# Altium PCB Rev(5).PCBDOC (part 3 of 3)
Units mm, origin at the board's own origin, x right, y up, seen from the top; angles counter-clockwise.
Board outline 161.79 x 99.5 mm, 4 copper layers (Top Layer, InternalPlane1, InternalPlane2, Bottom Layer); 374 components, 275 nets, 1404 pads, 444 vias.
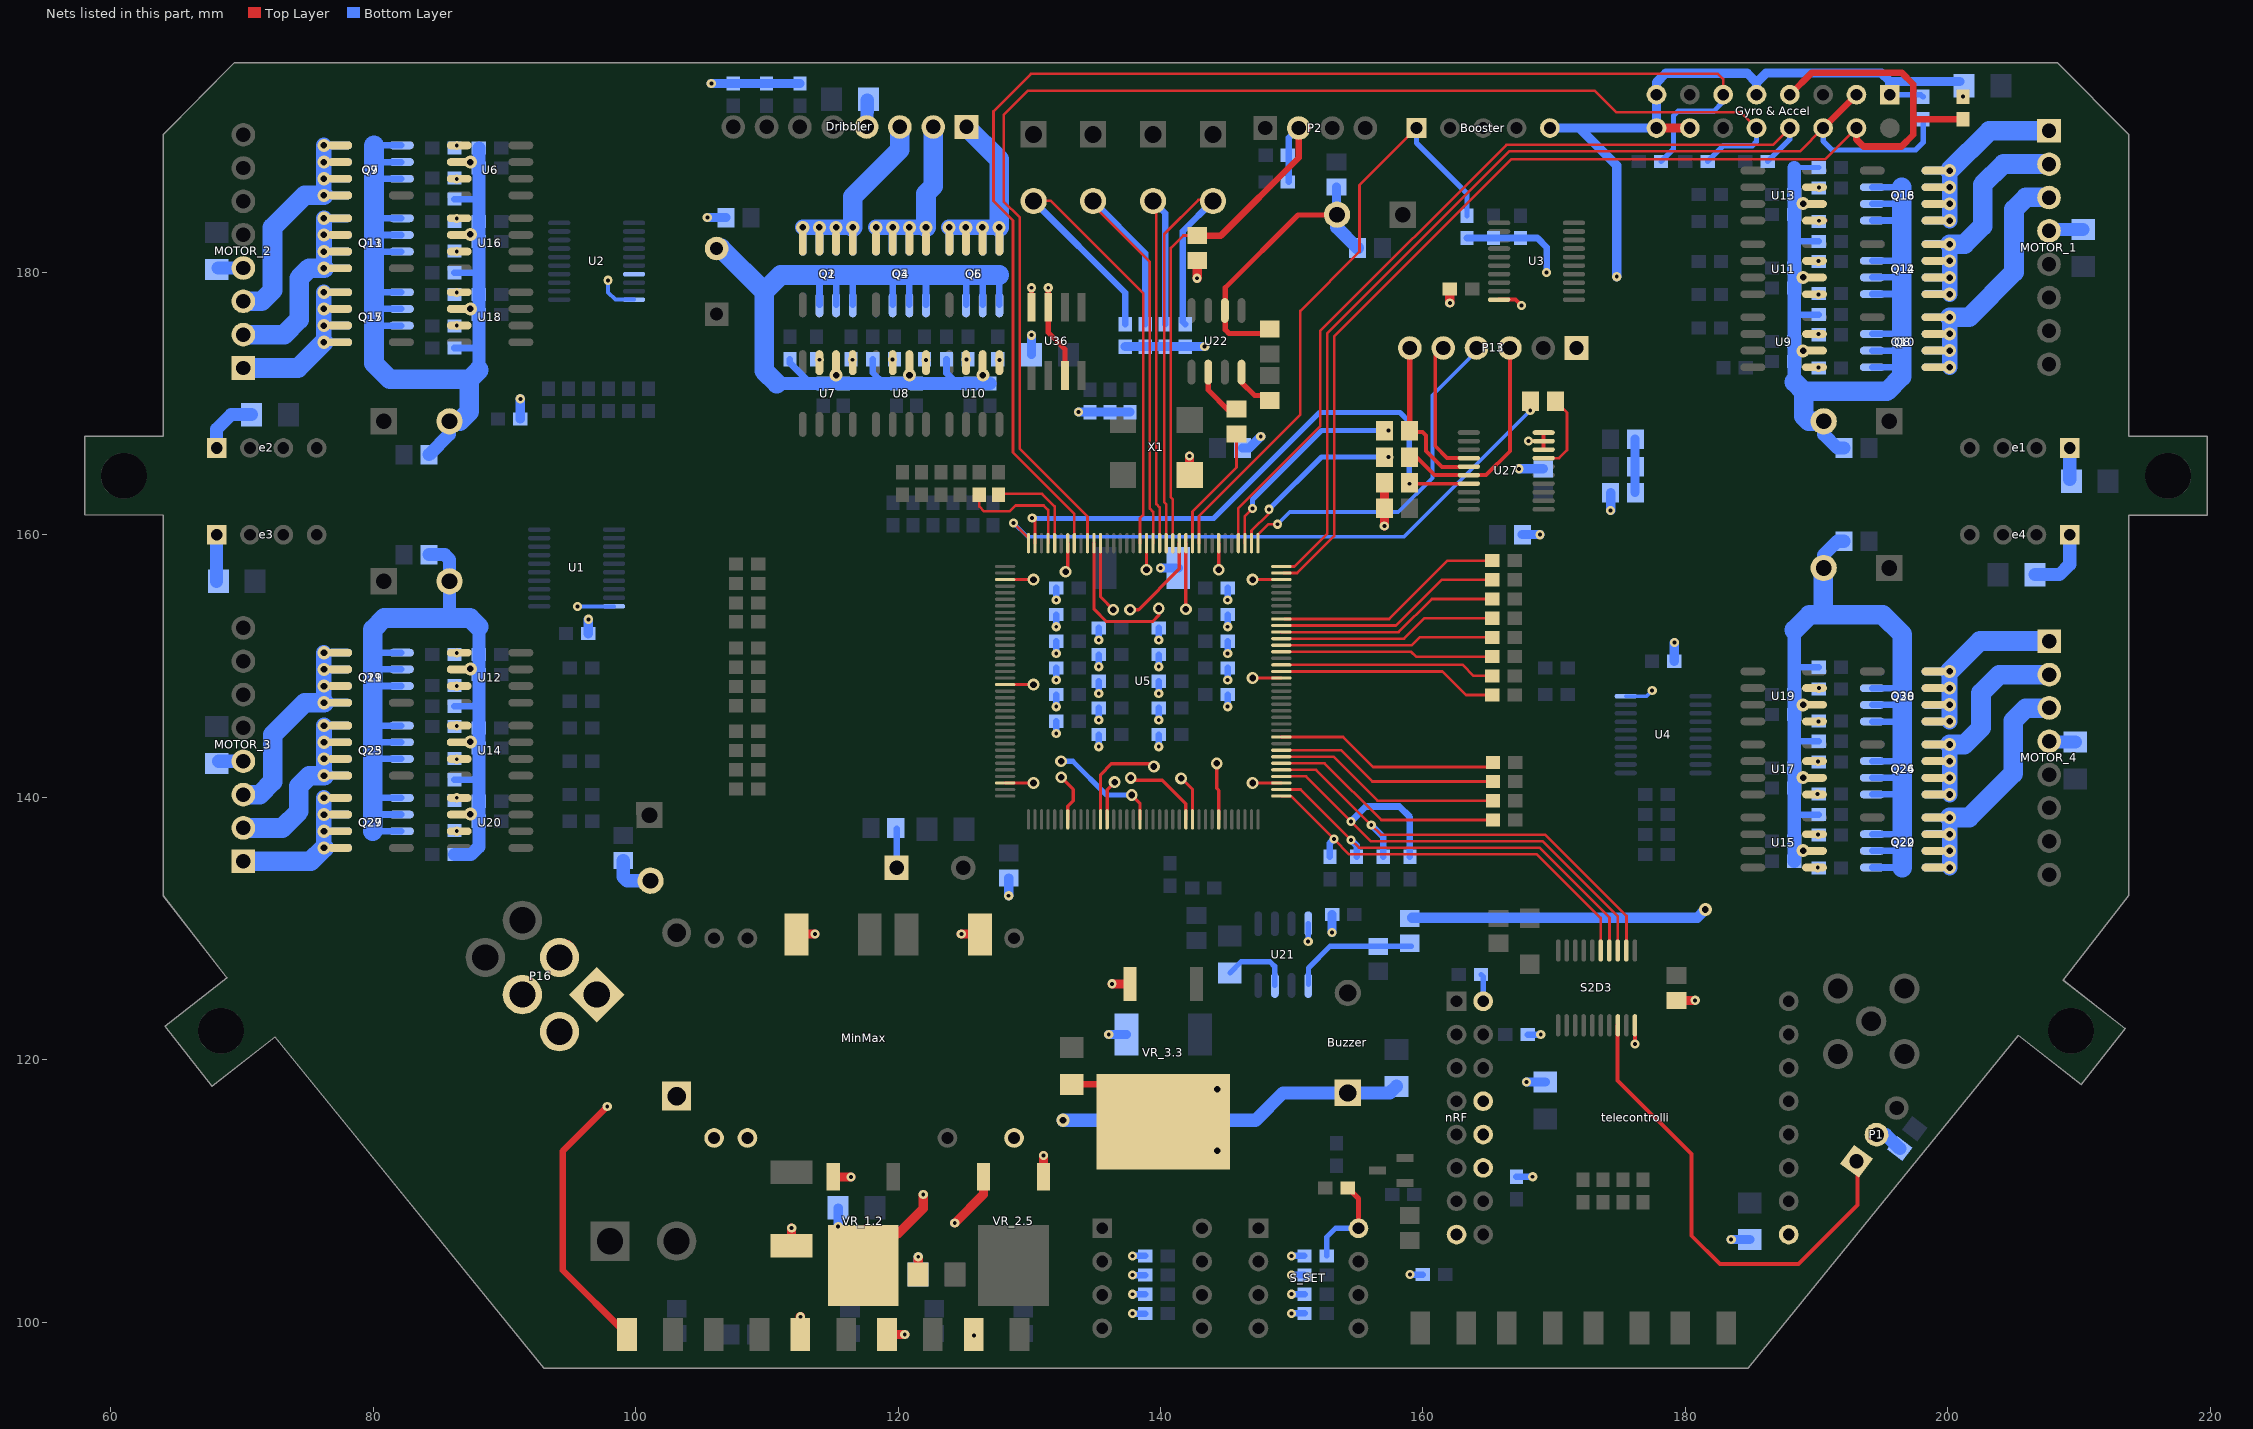
[diagram p5: the nets of this part, all layers, seen from the top]

## Via types
v1: diameter 0.7, hole 0.3, Top Layer to Bottom Layer, 308 vias
v2: diameter 1, hole 0.5, Top Layer to Bottom Layer, 66 vias
v3: diameter 0.9, hole 0.5, Top Layer to Bottom Layer, 38 vias
v4: diameter 0.99, hole 0.5, Top Layer to Bottom Layer, 30 vias
v5: diameter 0.6, hole 0.3, Top Layer to Bottom Layer, 2 vias

## Nets (pads, with @x,y where several pads share a name; then routed paths per layer and width w, separated by ;. In a path a pad name is that pad's centre, name@x,y a point inside that pad or via, vN(x,y) a via of type N, cw(c..) or ccw(c..) an arc to the next point about the centre after c; other vN are vias at no path point) (continued)
NetR22_1: R22.1 U22.4 | length 3.3
  Top Layer w0.4: U22.4@146.177,172.402 146.177,171.623 147.18,170.62 R22.1@148.32,170.62
NetR31_2: R31.2 R345.2 R346.2 | length 4.1
  Bottom Layer w0.7: R345.2@176.17,163.25 176.17,165.246 176.17,167.278 R346.2@176.17,167.31
NetR43_1: R43.1 R45.2 U21.1 | length 13.5
  Bottom Layer w0.4: U21.1@151.27,125.75 151.27,127 152.916,128.646 ; R45.2@156.604,128.646 152.916,128.646 ; R43.1@159.134,128.646 159.004,128.646 152.916,128.646
NetR46_2: R46.2 U21.3 | length 5.4
  Bottom Layer w0.4: R46.2@145.288,126.616 146.142,127.47 148.35,127.47 148.7,127.12 U21.3@148.7,125.66
NetR47_1: R47.1 U7.7
  other v1: 114.02,173.35
NetR48_1: R48.1 U7.5
  other v1: 116.53,173.35
NetR49_1: R49.1 U8.7
  other v1: 119.58,173.36
NetR50_1: R50.1 U8.5
  other v1: 122.14,173.34
NetR51_1: R51.1 U10.7
  other v1: 125.2,173.36
NetR52_1: R52.1 U10.5
  other v1: 127.72,173.34
NetR59_1: R59.1 U6.7
  other v1: 86.37,187.13
NetR60_1: R60.1 U9.7
  other v1: 190.15,175.31
NetR61_1: R61.1 U6.5
  other v1: 86.37,189.68
NetR62_1: R62.1 U9.5
  other v1: 190.14,172.76
NetR65_1: R65.1 U16.7
  other v1: 86.37,181.59
NetR66_1: R66.1 U11.7
  other v1: 190.14,180.86
NetR67_1: R67.1 U16.5
  other v1: 86.37,184.12
NetR68_1: R68.1 U11.5
  other v1: 190.15,178.32
NetR71_1: R71.1 U18.7
  other v1: 86.37,175.96
NetR72_1: R72.1 U13.7
  other v1: 190.2,186.48
NetR73_1: R73.1 U18.5
  other v1: 86.37,178.48
NetR74_1: R74.1 U13.5 | length 0.8
  Top Layer w0.4: U13.5@189.84,183.951 190.19,183.951 U13.5@190.631,183.951
  other v1: 190.19,183.94
NetR77_1: R77.1 U12.7
  other v1: 86.37,148.47
NetR78_1: R78.1 U15.7
  other v1: 190.12,137.17
NetR79_1: R79.1 U12.5
  other v1: 86.37,151
NetR80_1: R80.1 U15.5
  other v1: 190.09,134.64
NetR83_1: R83.1 U14.7
  other v1: 86.37,142.9
NetR84_1: R84.1 U17.7
  other v1: 190.12,142.74
NetR85_1: R85.1 U14.5
  other v1: 86.37,145.45
NetR86_1: R86.1 U17.5
  other v1: 190.08,140.24
NetR89_1: R89.1 U20.7
  other v1: 86.37,137.42
NetR90_1: R90.1 U19.7
  other v1: 190.17,148.32
NetR91_1: R91.1 U20.5
  other v1: 86.37,139.97
NetR92_1: R92.1 U19.5
  other v1: 190.14,145.78
NetR112_1: R112.1 R148.1 S_SET.8 | length 7.5
  Top Layer w0.4: R148.1@154.266,110.236 155.086,109.416 S_SET.8@155.086,107.156
  Bottom Layer w0.4: R112.1@152.672,105.058 152.672,106.492 153.336,107.156 S_SET.8@155.086,107.156
NetR122_2: R122.2 S4.1 | length 3
  Bottom Layer w0.5: S4.1@119.888,134.63 R122.2@119.888,137.602
NetR333_1: R333.1 U22.2 | length 4
  Top Layer w0.4: U22.2@143.64,172.402 143.64,171.04 145.15,169.53 R333.1@145.64,169.53
NetR341_2: R341.2 U5.144 | length 45.8
  Top Layer w0.2: v1(128.8,160.91) 129.934,159.776 U5.144@129.934,159.369
  Bottom Layer w0.3: v1(128.8,160.91) 129.85,159.86 158.55,159.86 v1(168.18,169.49)
NetR342_2: R342.2 U5.110 | length 13.7
  Top Layer w0.2: U5.110@146.934,159.369 146.934,160.324 148.25,161.64 v1@148.25,161.75
  Bottom Layer w0.4: v1(148.28,161.95) 152.27,165.94 v1@157.39,165.94
  other v1: 157.39,165.92
NetR343_2: R343.2 U5.111 | length 16.1
  Top Layer w0.2: U5.111@146.434,159.369 146.434,161.424 v1(147.02,162.01)
  Bottom Layer w0.4: v1(147.02,162.01) 147.02,162.69 152.28,167.95 v1@157.34,167.95
  other v1: 157.37,167.95
O11: MOTOR_1.3 Q8.5 Q8.6 Q8.7 Q8.8 Q10.5 Q10.6 Q10.7 Q10.8 | length 18
  Bottom Layer w1.2: v2@200.15,172.773 v2@200.15,176.583
  Bottom Layer w1.5: v2@200.15,176.583 201.613,176.583 205.05,180.02 205.05,184.81 205.96,185.72 MOTOR_1.3@207.724,185.72
  other v2: 200.14,172.773 200.14,174.043 200.14,175.313 200.14,176.583
O12: MOTOR_1.2 Q12.5 Q12.6 Q12.7 Q12.8 Q14.5 Q14.6 Q14.7 Q14.8 | length 15.8
  Bottom Layer w1.2: v2(200.14,178.343) v2(200.14,182.153)
  Bottom Layer w1.5: v2(200.14,182.153) 201.283,182.153 202.66,183.53 202.66,186.69 204.238,188.268 MOTOR_1.2@207.732,188.268
  other v2: 200.14,179.613 200.14,180.883
O13: MOTOR_1.1 Q16.5 Q16.6 Q16.7 Q16.8 Q18.5 Q18.6 Q18.7 Q18.8 | length 12.6
  Bottom Layer w1.2: v2@200.15,183.951 v2@200.15,187.761
  Bottom Layer w1.5: v2(200.14,187.761) 203.169,190.79 MOTOR_1.1@207.714,190.79
  other v2: 200.14,183.951 200.14,185.221 200.14,186.491
O21: MOTOR_2.3 Q7.5 Q7.6 Q7.7 Q7.8 Q9.5 Q9.6 Q9.7 Q9.8 | length 16.1
  Bottom Layer w1.2: v2(76.24,185.873) v2(76.24,189.683)
  Bottom Layer w1.5: MOTOR_2.3@70.104,177.8 71.49,177.8 72.33,178.64 72.33,183.43 74.773,185.873 v2(76.24,185.873)
  other v2: 76.24,187.143 76.24,188.413
O22: MOTOR_2.2 Q11.5 Q11.6 Q11.7 Q11.8 Q13.5 Q13.6 Q13.7 Q13.8 | length 13.9
  Bottom Layer w1.2: v2@76.25,180.321 v2@76.25,184.131
  Bottom Layer w1.5: MOTOR_2.2@70.104,175.26 73.22,175.26 74.36,176.4 74.36,179.56 75.121,180.321 v2@76.25,180.321
  other v2: 76.24,180.321 76.24,181.591 76.24,182.861 76.24,184.131
O23: MOTOR_2.1 Q15.5 Q15.6 Q15.7 Q15.8 Q17.5 Q17.6 Q17.7 Q17.8 | length 10.8
  Bottom Layer w1.2: v2(76.24,174.685) v2(76.24,178.495)
  Bottom Layer w1.5: MOTOR_2.1@70.104,172.72 74.275,172.72 v2(76.24,174.685)
  other v2: 76.24,175.955 76.24,177.225
O31: MOTOR_3.3 Q19.5 Q19.6 Q19.7 Q19.8 Q21.5 Q21.6 Q21.7 Q21.8 | length 14.9
  Bottom Layer w1.2: v2@76.24,147.211 v2@76.24,151.021
  Bottom Layer w1.5: MOTOR_3.3@70.104,140.208 71.358,140.208 72.34,141.19 72.34,144.76 74.791,147.211 v2(76.25,147.211)
  other v2: 76.25,148.481 76.25,149.751 76.25,151.021
O32: MOTOR_3.2 Q23.5 Q23.6 Q23.7 Q23.8 Q25.5 Q25.6 Q25.7 Q25.8 | length 12.7
  Bottom Layer w1.2: v2(76.25,141.655) v2(76.25,145.465)
  Bottom Layer w1.5: MOTOR_3.2@70.104,137.668 73.068,137.668 74.33,138.93 74.33,140.85 75.135,141.655 v2(76.25,141.655)
  other v2: 76.25,142.925 76.25,144.195
O33: MOTOR_3.1 Q27.5 Q27.6 Q27.7 Q27.8 Q29.5 Q29.6 Q29.7 Q29.8 | length 10.4
  Bottom Layer w1.2: v2@76.24,136.145 v2@76.24,139.955
  Bottom Layer w1.5: MOTOR_3.1@70.1,135.13 75.235,135.13 v2(76.25,136.145)
  other v2: 76.25,137.415 76.25,138.685 76.25,139.955
O41: MOTOR_4.3 Q20.5 Q20.6 Q20.7 Q20.8 Q22.5 Q22.6 Q22.7 Q22.8 | length 17.2
  Bottom Layer w1.2: v2@200.15,134.647 v2@200.15,138.457
  Bottom Layer w1.5: v2@200.15,138.457 201.627,138.457 204.98,141.81 204.98,145.83 205.95,146.8 MOTOR_4.3@207.74,146.8
  other v2: 200.14,134.647 200.14,135.917 200.14,137.187 200.14,138.457
O42: MOTOR_4.2 Q24.5 Q24.6 Q24.7 Q24.8 Q26.5 Q26.6 Q26.7 Q26.8 | length 15.1
  Bottom Layer w1.2: v2@200.15,140.217 v2@200.15,144.027
  Bottom Layer w1.5: v2@200.15,144.027 201.257,144.027 202.53,145.3 202.53,147.95 203.93,149.35 MOTOR_4.2@207.73,149.35
  other v2: 200.14,140.217 200.14,141.487 200.14,142.757 200.14,144.027
O43: MOTOR_4.1 Q28.5 Q28.6 Q28.7 Q28.8 Q30.5 Q30.6 Q30.7 Q30.8 | length 12.4
  Bottom Layer w1.2: v2@200.13,145.785 v2@200.13,149.595
  Bottom Layer w1.5: v2(200.14,149.595) 202.455,151.91 MOTOR_4.1@207.75,151.91
  other v2: 200.14,145.785 200.14,147.055 200.14,148.325
OD1: Dribbler.3 Q1.5 Q1.6 Q1.7 Q1.8 Q2.5 Q2.6 Q2.7 Q2.8 | length 12.9
  Bottom Layer w1.2: v2@112.733,183.44 v2@116.543,183.44
  Bottom Layer w1.5: v2@116.543,183.44 116.543,185.763 120.138,189.358 Dribbler.3@120.138,191.088
  other v2: 112.733,183.43 114.003,183.43 115.273,183.43 116.543,183.43
OD2: Dribbler.2 Q3.5 Q3.6 Q3.7 Q3.8 Q4.5 Q4.6 Q4.7 Q4.8 | length 11.7
  Bottom Layer w1.2: v2@118.321,183.44 v2@122.127,183.44
  Bottom Layer w1.5: v2@122.127,183.44 122.127,186.007 122.678,186.558 Dribbler.2@122.678,191.088
  other v2: 118.321,183.43 119.591,183.43 120.861,183.43 122.131,183.43
OD3: Dribbler.1 Q5.5 Q5.6 Q5.7 Q5.8 Q6.5 Q6.6 Q6.7 Q6.8 | length 12.5
  Bottom Layer w1.2: v2@123.891,183.44 v2@127.701,183.44
  Bottom Layer w1.5: Dribbler.1@125.23,191.1 127.701,188.629 v2@127.701,183.44
  other v2: 123.891,183.43 125.161,183.43 126.431,183.43 127.701,183.43
OVER_DRIB(3.3): U2.17
"P.R TDO": R341.1 U27.17 | length 6.1
  Top Layer w0.2: U27.17@169.198,165.851 170.381,165.851 170.981,166.451 170.981,169.313 R341.1@170.114,170.18
PROG_B: R33.1 U5.143 U27.7 | length 43.6
  Top Layer w0.2: v1(130.22,161.28) 130.434,161.066 U5.143@130.434,159.369
  Top Layer w0.3: v1(158.962,163.9) U27.7@163.47,163.9
  Bottom Layer w0.4: v1@130.24,161.25 144.05,161.25 152.12,169.32 158.25,169.32 158.962,168.608 v1(158.962,163.9)
R_IO1: "Gyro & Accel.3" "Gyro & Accel.6" R149.2 U5.108 | length 78.6
  Top Layer w0.2: U5.108@149.209,157.594 150.204,157.594 152.72,160.11 152.72,175.38 166.57,189.23 188.722,189.23 190.5,191.008
  Top Layer w0.5: 190.5,191.008 193.04,193.548
  Bottom Layer w0.4: 190.5,191.008 190.5,190.01 191.17,189.34 197.55,189.34 198.12,189.91 R149.2@198.12,191.682
R_IO2: "Gyro & Accel.4" "Gyro & Accel.7" R150.2 U5.107 | length 90.5
  Top Layer w0.2: U5.107@149.37,157.094 150.414,157.094 153.24,159.92 153.24,175.13 166.73,188.62 190.652,188.62 193.04,191.008
  Top Layer w0.5: 187.96,193.548 189.642,195.23 196.48,195.23 197.36,194.35 197.36,190.49 196.47,189.6 193.58,189.6 193.04,190.14 193.04,191.008 ; 197.402,191.682 R150.2@201.168,191.682
R_IO7: R12.1 U5.100 | length 17.7
  Top Layer w0.2: U5.100@149.466,153.594 157.424,153.594 161.874,158.044 R12.1@165.298,158.044
R_IO8: R14.1 U5.99 | length 17.5
  Top Layer w0.2: U5.99@149.209,153.094 157.934,153.094 161.42,156.58 R14.1@165.298,156.58
R_IO9: R16.1 U5.98 | length 17.1
  Top Layer w0.2: U5.98@149.209,152.594 158.154,152.594 160.676,155.116 R16.1@165.298,155.116
R_IO10: R18.1 U5.97 | length 16.7
  Top Layer w0.2: U5.97@149.209,152.094 158.554,152.094 160.112,153.652 R18.1@165.298,153.652
R_IO11: R19.1 U5.96 | length 16.3
  Top Layer w0.2: U5.96@149.209,151.594 159.154,151.594 159.746,152.186 R19.1@165.298,152.186
R_IO12: R23.1 U5.95 | length 16.2
  Top Layer w0.2: U5.95@149.209,151.094 159.105,151.095 159.478,150.722 R23.1@165.298,150.722
R_IO13: R26.1 U5.93 | length 16.4
  Top Layer w0.2: U5.93@149.209,150.094 163.036,150.094 163.872,149.258 R26.1@165.298,149.258
R_IO14: R28.1 U5.92 | length 16.8
  Top Layer w0.2: U5.92@149.209,149.594 161.486,149.594 163.286,147.794 R28.1@165.298,147.794
R_IO22: R20.1 U5.82 | length 17.2
  Top Layer w0.2: U5.82@149.209,144.594 153.926,144.594 156.21,142.31 164.98,142.31 R20.1@165.338,142.668
R_IO23: R25.1 U5.80 | length 17.1
  Top Layer w0.2: U5.80@149.209,143.594 153.756,143.594 156.146,141.204 R25.1@165.338,141.204
R_IO24: R27.1 U5.79 | length 17.5
  Top Layer w0.2: U5.79@149.209,143.094 153.186,143.094 156.54,139.74 R27.1@165.338,139.74
R_IO25: R29.1 U5.78 | length 17.9
  Top Layer w0.2: U5.78@149.209,142.594 152.516,142.594 156.834,138.276 R29.1@165.338,138.276
R_IO26: R120.1 S2D3.2 U5.77 | length 36.4
  Top Layer w0.2: U5.77@149.209,142.094 151.856,142.094 v1(156.06,137.89) 156.79,137.16 169.32,137.16 175.51,130.97 S2D3.2@175.51,128.27
  Bottom Layer w0.5: v1(156.06,137.89) 156.972,136.978 R120.1@156.972,135.47
R_IO27: R121.1 S2D3.3 U5.76 | length 41
  Top Layer w0.2: U5.76@149.209,141.594 151.086,141.594 v1(154.513,138.167) 156.02,136.66 169.102,136.66 174.85,130.912 S2D3.3@174.85,128.29
  Bottom Layer w0.5: v1(154.513,138.167) 155.646,139.3 158.2,139.3 159.004,138.496 R121.1@159.004,135.47
R_IO28: R123.1 S2D3.4 U5.74 | length 33
  Top Layer w0.2: U5.74@149.209,140.594 150.676,140.594 v1(154.513,136.757) 155.11,136.16 168.89,136.16 174.22,130.83 S2D3.4@174.22,128.3
  Bottom Layer w0.5: v1(154.513,136.757) 154.94,136.33 R123.1@154.94,135.47
R_IO29: R124.1 S2D3.5 U5.73 | length 32.1
  Top Layer w0.2: U5.73@149.209,140.094 149.936,140.094 v1(153.214,136.816) 154.37,135.66 168.68,135.66 173.54,130.8 S2D3.5@173.54,128.31
  Bottom Layer w0.5: R124.1@152.908,135.47 152.908,136.511 v1(153.214,136.816)
S_TDO: P13.4 U5.109 | length 26.4
  Top Layer w0.2: U5.109@147.434,160.034 148.21,160.81 v1(148.92,160.81)
  Bottom Layer w0.3: v1(148.92,160.81) 149.85,161.74 158.121,161.74 160.73,164.35 160.73,170.64 164.1,174.01 P13.4@164.1,174.28
SERVO_O: P1.1 S2D3.18 | length 36.7
  Top Layer w0.3: S2D3.18@174.84,122.63 174.84,118.43 180.46,112.81 180.46,106.59 182.63,104.42 188.61,104.42 193.13,108.94 P1.1@193.13,111.79
SHOOT_PULSE: Booster.1 R116.2 U5.118 | length 46.8
  Top Layer w0.2: U5.118@142.934,159.369 142.934,161.434 150.66,169.16 150.66,177.08 155.17,181.59 155.17,186.666 Booster.1@159.512,191.008
  Bottom Layer w0.4: Booster.1@159.512,191.008 159.512,189.858 163.36,186.01 R116.2@163.36,184.326
TCK: P13.3 R342.1 U27.6 | length 16.8
  Top Layer w0.3: R342.1@158.962,165.912 159.548,165.912 160.89,164.57 U27.6@163.43,164.57 ; U27.6@163.49,164.55 164.8,164.55 166.624,166.374 P13.3@166.624,174.244
TDI: P13.5 U27.4 | length 10.6
  Top Layer w0.3: P13.5@161.544,174.244 160.94,173.64 160.94,166.76 161.83,165.87 U27.4@163.45,165.87
TMS: P13.6 R343.1 U27.5 | length 13
  Top Layer w0.3: R343.1@159.004,167.84 159.97,167.84 160.23,167.58 160.23,166.4 161.45,165.18 U27.5@163.51,165.18
  Top Layer w0.4: P13.6@159.004,174.244 159.004,167.84 R343.1@159.32,167.84
U_IO1: R35.1 U5.141 | length 9.2
  Top Layer w0.2: R35.1@126.188,163.06 126.188,162.152 126.55,161.79 128.51,161.79 128.96,162.24 131.1,162.24 131.434,161.906 U5.141@131.434,159.369
U_IO2: R37.1 U5.140 | length 7.3
  Top Layer w0.2: R37.1@127.84,163.13 130.98,163.13 131.934,162.176 U5.140@131.934,159.369
U_IO3: "Gyro & Accel.11" R160.2 U5.137 | length 102.3
  Top Layer w0.2: U5.137@133.434,159.369 133.434,161.606 128.76,166.28 128.76,183.96 127.27,185.45 127.27,192.28 130.13,195.14 182.48,195.14 182.88,194.74 182.88,193.548
  Bottom Layer w0.2: 182.88,193.01 182.88,193.548
  Bottom Layer w0.4: R160.2@178.142,188.468 179.09,189.416 179.09,191.94 179.44,192.29 182.16,192.29 182.88,193.01
U_IO4: "Gyro & Accel.10" R159.1 U5.135 | length 100
  Top Layer w0.2: U5.135@134.434,159.369 134.434,161.396 129.26,166.57 129.26,184.21 128.05,185.42 128.05,192 129.9,193.85 173.08,193.85 174.72,192.21 184.218,192.21 185.42,191.008
  Bottom Layer w0.4: R159.1@181.698,188.468 182.88,189.65 185.1,189.65 185.42,189.97 185.42,191.008
U_IO5: R113.1 S_D_1.2 U5.127 | length 42.9
  Top Layer w0.2: S_D_1.2@130.16,185.47 131.63,185.47 138.68,178.42 138.68,161.52 138.434,161.274 U5.127@138.434,159.369
  Bottom Layer w0.5: S_D_1.2@130.33,185.444 137.314,178.46 R113.1@137.314,176.05
U_IO6: R133.1 S_D_2.2 U5.125 | length 39
  Top Layer w0.2: S_D_2.2@134.84,185.47 134.84,185.16 139.19,180.81 139.19,162 139.434,161.756 U5.125@139.434,159.369
  Bottom Layer w0.5: S_D_2.2@134.862,185.444 138.838,181.468 R133.1@138.838,176.05
U_IO7: R153.1 S_D_3.2 U5.124 | length 36
  Top Layer w0.2: S_D_3.2@139.41,185.41 139.69,185.13 139.69,162.35 139.934,162.106 U5.124@139.934,159.369
  Bottom Layer w0.5: S_D_3.2@139.434,185.444 140.362,184.516 R153.1@140.362,176.05
U_IO8: R173.1 S_D_4.2 U5.123 | length 39
  Top Layer w0.2: U5.123@140.434,159.369 140.434,162.34 140.29,162.484 140.29,182.95 142.88,185.54 S_D_4.2@144.15,185.54
  Bottom Layer w0.5: R173.1@141.886,176.05 141.7,176.236 141.7,183.138 S_D_4.2@144.006,185.444
U_IO9: C64.2 P2.2 R55.1 R93.2 U5.122 | length 41.9
  Top Layer w0.2: U5.122@140.934,159.369 140.934,162.716 140.79,162.86 140.79,181.87 141.734,182.814 R55.1@142.796,182.814
  Top Layer w0.5: R55.1@142.796,182.814 144.604,182.814 150.54,188.75 P2.2@150.54,191.03
  Bottom Layer w0.5: C64.2@149.79,186.898 149.79,190.262 P2.2@150.536,191.008
U_IO10: R333.2 U5.119 | length 9.7
  Top Layer w0.2: U5.119@142.434,159.369 142.434,161.784 145.79,165.14 R333.2@145.79,167.69
U_IO14: "Gyro & Accel.8" R155.1 U5.112 | length 64.2
  Top Layer w0.2: U5.112@145.934,159.369 145.934,162.034 152.185,168.285 152.185,175.565 166.35,189.73 186.682,189.73 187.96,191.008
  Bottom Layer w0.4: R155.1@186.27,188.468 187.96,190.158 187.96,191.008
"V 1.2": C33.2 C34.2 C35.2 C36.2 C62.2 C75.2 U5.49 U5.61 U5.121 U5.133 VR_1.2.4 | length 34.5
  Top Layer w0.25: U5.133@135.434,159.369 135.434,155.266 v3(136.4,154.3) ; U5.49@135.934,138.319 135.934,140.594 v3(136.5,141.16) ; v3(137.68,154.3) 138.33,154.3 141.434,157.404 U5.121@141.434,159.369 ; v3(137.73,141.48) 137.9,141.31 140.13,141.31 141.934,139.506 U5.61@141.934,138.319
  Top Layer w0.4: VR_1.2.4@116.34,102.89 VR_1.2.4@116.34,105.31
  Top Layer w0.7: VR_1.2.4@119.46,106.72 119.98,106.72 121.92,108.66 v1(121.92,109.73)
  Bottom Layer w0.5: v1(135.294,143.858) C35.2@135.294,144.78 ; v1(135.294,145.89) C34.2@135.294,146.812 ; v1(135.294,147.922) C75.2@135.294,148.844 ; v1(135.294,149.954) C36.2@135.294,150.876 ; v1(135.294,151.986) C33.2@135.294,152.908
  Bottom Layer w0.7: v1@115.44,107.294 C62.2@115.44,108.712
  other v1: 115.436,107.29
"V 2.5": C11.2 C12.2 C13.2 C31.2 C73.2 C74.2 D21.1 R2.5.2 R33.2 R34.1 U5.48 U5.62 U5.120 U5.134 VR_2.5.3 | length 43.9
  Top Layer w0.25: U5.134@134.934,159.369 134.934,154.336 135.87,153.4 139.4,153.4 139.88,153.88 v3(139.86,154.39) ; U5.48@135.434,138.319 135.434,141.734 136.25,142.55 139.3,142.55 v3(139.5,142.35) ; v3@141.6,141.47 142.434,140.636 U5.62@142.434,138.319 ; v3(141.934,154.34) U5.120@141.934,159.369
  Top Layer w0.7: D21.1@119.154,99.06 v1@120.504,99.06 ; C31.2@121.536,103.552 v1@121.536,104.902 ; v1(124.32,107.55) 126.51,109.74 VR_2.5.3@126.51,111.06 ; v1@157.062,160.674 R33.2@157.062,163.968
  Bottom Layer w0.5: v1(139.866,143.858) C74.2@139.866,144.78 ; v1(139.866,145.89) C12.2@139.866,146.812 ; v1(139.866,147.922) C73.2@139.866,148.844 ; v1(139.866,149.954) C11.2@139.866,150.876 ; v1(139.866,151.986) C13.2@139.866,152.908
  Bottom Layer w0.7: R2.5.2@121.536,103.632 v1@121.536,104.982
  other v1: 120.508,99.056 121.54,104.986 157.058,160.67
  other v3: 141.57,141.44
"V 3.3": "Gyro & Accel.1" "Gyro & Accel.9" "Gyro & Accel.14" "Gyro & Accel.15" "Gyro & Accel.16" Booster.5 C2(tele).1 C8.1 C10.1 C14.2 C15.2 C16.2 C17.2 C18.2 C20.1 C21.1 C23.2 C24.2 C25.2 C37.2 C38.2 C39.2 C72.1 C76.2 C77.2 C78.2 C79.2 C80.1 C(tele).1 CnRF.2 D3.1 nRF.8 P13.1 R32.1 R55.2 R109.1 R110.1 R111.2 R112.2 R113.2 R115.2 R116.1 R117.1 R118.1 R119.1 R127.1 R128.1 R131.2 R132.2 R133.2 R149.1 R150.1 R151.2 R152.2 R153.2 R158.1 R171.2 R172.2 R173.2 R345.1 R(rst).1 telecontrolli.1 telecontrolli.11 telecontrolli.12 telecontrolli.13 telecontrolli.16 U1.20 U2.20 U3.20 U4.20 U5.3 U5.19 U5.34 U5.43 U5.54 U5.66 U5.75 U5.91 U5.106 U5.115 U5.126 U5.138 U21.8 U27.18 U27.19 U27.20 U36.3 U36.7 U36.8 VR_3.3.4 X1.4 | length 182.5
  Top Layer w0.25: U5.34@128.159,141.094 v3(130.32,141.094) ; U5.19@128.159,148.594 v3(130.32,148.594) ; U5.3@128.159,156.594 v3(130.32,156.594) ; v3(132.434,141.53) 133.36,140.604 133.36,139.75 132.934,139.324 U5.43@132.934,138.319 ; v3@132.934,157.19 U5.138@132.934,159.369 ; v3(137.81,140.18) 138.434,139.556 U5.54@138.434,138.319 ; v3(138.934,157.34) U5.126@138.934,159.369 ; v3(144.28,142.59) 144.28,140.68 144.434,140.526 U5.66@144.434,138.319 ; v3(144.434,157.34) U5.115@144.434,159.369 ; v3(147.02,141.094) U5.75@149.209,141.094 ; v3(147.02,149.094) U5.91@149.209,149.094 ; v3(147.02,156.594) U5.106@149.209,156.594
  Top Layer w0.3: U3.20@165.806,177.923 167.051,177.923 v1(167.5,177.474) ; v1@168.042,167.151 U27.19@169.198,167.151 ; U27.18@169.198,166.501 U27.20@169.198,167.801
  Top Layer w0.4: U36.8@130.175,177.352 v1(130.175,178.835) ; v1(131.445,178.835) 131.445,175.415 132.715,174.145 U36.3@132.715,172.152
  Top Layer w0.5: C8.1@133.222,118.13 135.91,118.13 VR_3.3.4@137.08,116.96
  Top Layer w0.7: X1.4@142.22,164.564 v1@142.22,166.022 ; v1@142.796,179.564 R55.2@142.796,180.914 ; v1@162.048,177.67 C76.2@162.048,178.734 ; 177.8,191.008 180.34,191.008
  Bottom Layer w0.3: v1(95.56,154.555) U1.20@98.354,154.555 ; v1(97.9,179.4) 97.9,178.48 98.457,177.923 U2.20@99.878,177.923 ; U4.20@175.458,147.705 177.035,147.705 v1(177.47,148.14)
  Bottom Layer w0.4: v3(132.422,142.748) 133.312,142.748 135.88,140.18 v3(137.81,140.18) ; v1@151.257,129.016 U21.8@151.257,130.366 ; CnRF.2@164.426,126.492 164.592,126.326 telecontrolli.16@164.592,124.46 ; 195.58,193.548 197.954,193.548 R149.1@198.12,193.382
  Bottom Layer w0.5: v1(132.056,144.874) C23.2@132.056,145.796 ; v1(132.056,146.906) C78.2@132.056,147.828 ; v1(132.056,148.938) C17.2@132.056,149.86 ; v1(132.056,150.97) C77.2@132.056,151.892 ; v1(132.056,153.002) C18.2@132.056,153.924 ; v1(132.056,155.034) C25.2@132.056,155.956 ; v1(137.86,100.66) R171.2@138.844,100.66 ; v1(137.86,102.13) R151.2@138.85,102.13 ; v1(137.86,103.59) R131.2@138.846,103.59 ; v1(137.86,105.05) R111.2@138.842,105.05 ; v1(145.122,146.906) C15.2@145.122,147.828 ; v1(145.122,148.938) C16.2@145.122,149.86 ; v1(145.122,150.97) C79.2@145.122,151.892 ; v1(145.122,153.002) C14.2@145.122,153.924 ; v1(145.122,155.034) C24.2@145.122,155.956 ; v1(149.988,100.666) R172.2@150.972,100.666 ; v1(149.988,102.136) R152.2@150.978,102.136 ; v1(149.988,103.596) R132.2@150.974,103.596 ; v1(149.988,105.056) R112.2@150.97,105.056 ; v1(159.014,103.632) R158.1@159.996,103.632 ; R116.1@163.36,182.626 168.724,182.626 169.422,181.928 v1(169.422,180.004) ; R128.1@167.132,111.086 v1(168.366,111.086) ; R127.1@167.982,121.92 v1(168.98,121.92)
  Bottom Layer w0.7: C37.2@91.21,168.824 v1(91.21,170.37) ; C39.2@96.394,152.472 v1@96.394,153.562 ; v1@128.434,132.502 128.434,133.852 ; C20.1@130.172,173.736 v1(130.172,175.219) ; v1@133.752,169.362 R110.1@137.686,169.362 ; R113.2@137.314,174.35 v1(143.369,174.35) ; v1@140.014,157.48 C80.1@141.364,157.48 ; C21.1@146.238,166.624 146.764,166.624 v1(147.64,167.5) ; v1@153.074,129.714 R119.1@153.074,131.064 ; v1@167.33,165.034 C72.1@169.164,165.034 ; R32.1@167.574,160.02 v1@168.924,160.02 ; v1@167.898,118.296 169.316,118.296 ; Booster.5@169.672,191.008 177.8,191.008 177.8,194.48 178.5,195.18 184.71,195.18 185.42,194.47 ; 171.912,191.008 174.77,188.15 v1(174.77,179.68) ; v1@174.31,161.864 R345.1@174.31,163.214 ; C38.2@179.158,150.368 v1@179.158,151.786 ; v1(183.49,106.296) 184.912,106.296 ; 185.42,193.548 185.42,194.47 ; 195.58,193.548 195.58,194.56 ; C10.1@200.906,194.56 195.58,194.56 ; 185.42,194.47 186.15,195.2 194.94,195.2 195.58,194.56
  other v1: 125.8,98.98 167.894,118.3 151.253,129.012 153.07,129.71 128.43,132.498 179.162,151.79 96.398,153.566 140.01,157.484 168.928,160.016 174.306,161.86 167.326,165.038 142.218,166.024 168.04,167.149 133.75,169.36 162.05,177.668 142.792,179.56 201.154,193.396
  other v2: 144.31,113.05 144.31,117.75
  other v3: 132.77,157.19
"V 12": C4.2 C19.2 C22.2 C26.2 C27.2 C28.2 C29.2 C30.2 C32.2 C40.2 C41.2 C42.2 C43.2 C44.2 C45.2 C46.2 C47.2 C48.2 C49.2 C50.2 C51.2 C52.2 C53.2 C54.2 C55.2 C56.2 C57.2 C58.2 C59.2 C60.2 C61.2 C66.1 C67.1 C68.1 C69.1 C70.1 C71.1 C81.1 C_DRIBBLER.2 C_IR.1 C_M1.2 C_M2.2 C_M3.2 C_M4.2 C_MIKONA.2 D1.1 D_correction.2 MinMax.3 MinMax.5 P16.1 P16.2 P16.3 P16.4 Q1.1 Q1.2 Q1.3 Q3.1 Q3.2 Q3.3 Q5.1 Q5.2 Q5.3 Q7.1 Q7.2 Q7.3 Q8.1 Q8.2 Q8.3 Q11.1 Q11.2 Q11.3 Q12.1 Q12.2 Q12.3 Q15.1 Q15.2 Q15.3 Q16.1 Q16.2 Q16.3 Q19.1 Q19.2 Q19.3 Q20.1 Q20.2 Q20.3 Q23.1 Q23.2 Q23.3 Q24.1 Q24.2 Q24.3 Q27.1 Q27.2 Q27.3 Q28.1 Q28.2 Q28.3 R43.2 R44.2 R129.1 R130.1 R135.1 R136.1 R137.1 R138.1 R139.1 R140.1 R141.1 R142.1 R143.1 R144.1 R145.1 R146.1 R147.1 U6.6 U7.6 U8.6 U9.6 U10.6 U11.6 U12.6 U13.6 U14.6 U15.6 U16.6 U17.6 U18.6 U19.6 U20.6 U22.6 | length 443.1
  Top Layer w0.4: U22.6@144.93,177.102 144.93,178.83 150.47,184.37 C_MIKONA.2@153.42,184.37 ; U22.6@144.94,177.11 144.94,175.63 145.22,175.35 C_IR.1@147.93,175.35 ; C_M1.2@189.84,168.59 C_M1.2@190.52,168.59
  Top Layer w0.5: v1(97.835,116.435) 94.44,113.04 94.44,103.962 D1.1@99.342,99.06
  Top Layer w1: P16.3@93.972,127.918 P16.3@93.972,128.024
  Top Layer w1.3: C_M4.2@190.51,157.5 C_M4.2@190.52,157.51
  Top Layer w2: P16.3@93.972,127.918 P16.3@94.135,127.755 ; P16.3@94.08,127.7 P16.3@94.135,127.755 ; P16.3@94.147,127.743 P16.3@94.135,127.755 ; P16.3@94.54,128.16 94.188,127.808 P16.3@94.135,127.755
  Bottom Layer w0.4: 188.342,188 R141.1@190.158,188
  Bottom Layer w0.5: 79.971,137.417 Q27.3@82.15,137.417 ; 79.97,138.693 Q27.2@82.149,138.693 ; 79.971,139.957 Q27.1@82.15,139.957 ; 79.971,142.927 Q23.3@82.15,142.927 ; 79.97,144.203 Q23.2@82.149,144.203 ; 79.971,145.467 Q23.1@82.15,145.467 ; 79.971,148.485 Q19.3@82.15,148.485 ; 79.97,149.761 Q19.2@82.149,149.761 ; 79.971,151.025 Q19.1@82.15,151.025 ; 80.061,175.95 Q15.3@82.15,175.95 ; 80.061,177.22 Q15.2@82.15,177.22 ; 80.061,178.49 Q15.1@82.15,178.49 ; 80.061,181.586 Q11.3@82.15,181.586 ; 80.061,182.856 Q11.2@82.15,182.856 ; 80.061,184.126 Q11.1@82.15,184.126 ; 80.061,187.145 Q7.3@82.15,187.145 ; 80.061,188.415 Q7.2@82.15,188.415 ; 80.061,189.685 Q7.1@82.15,189.685 ; R144.1@86.194,141.344 87.614,141.344 88.015,141.745 ; R142.1@86.194,146.942 87.596,146.942 88.037,147.383 ; R140.1@86.194,174.244 88.016,174.244 ; R138.1@86.194,179.982 88.048,179.982 ; R136.1@86.194,185.59 88.03,185.59 ; R129.1@111.76,173.394 111.76,173.096 113.318,171.538 ; Q1.3@114.011,177.531 114.011,179.8 ; Q1.2@115.279,177.531 115.279,179.8 ; Q1.1@116.549,177.531 116.549,179.8 ; R130.1@118.074,173.394 118.074,172.362 118.898,171.538 ; Q3.3@119.587,177.531 119.589,179.8 ; Q3.2@120.857,177.531 120.857,179.8 ; Q3.1@122.127,177.531 122.127,179.8 ; R135.1@123.692,173.394 123.692,172.334 124.488,171.538 ; Q5.3@125.183,177.531 125.183,179.8 ; Q5.2@126.451,177.531 126.451,179.8 ; Q5.1@127.721,177.531 127.721,179.8 ; 188.302,149.91 R147.1@190.158,149.91 ; 188.302,176.784 R137.1@190.158,176.784 ; 188.302,182.372 R139.1@190.158,182.372 ; 188.324,144.272 R145.1@190.158,144.272 ; 188.348,138.684 R143.1@190.158,138.684 ; Q8.1@194.241,172.779 196.48,172.779 ; Q8.2@194.241,174.049 196.48,174.049 ; Q8.3@194.241,175.319 196.48,175.319 ; Q12.1@194.241,178.357 196.48,178.357 ; Q12.2@194.241,179.627 196.48,179.627 ; Q12.3@194.241,180.897 196.48,180.897 ; Q16.1@194.241,183.959 196.48,183.959 ; Q16.2@194.241,185.229 196.48,185.229 ; Q16.3@194.241,186.499 196.48,186.499 ; Q28.1@194.246,145.773 196.54,145.773 ; Q28.2@194.246,147.043 196.54,147.043 ; Q28.3@194.246,148.309 196.54,148.309 ; Q20.1@194.25,134.653 196.544,134.653 ; Q20.2@194.25,135.923 196.544,135.923 ; Q20.3@194.25,137.189 196.544,137.189 ; Q24.1@194.25,140.223 196.544,140.223 ; Q24.2@194.25,141.493 196.544,141.493 ; Q24.3@194.25,142.759 196.544,142.759
  Bottom Layer w0.7: v1@105.466,184.178 C69.1@106.884,184.178 ; C_MIKONA.2@153.416,184.374 R44.2@153.416,186.512
  Bottom Layer w0.8: R43.2@159.17,130.81 180.89,130.81 v2(181.53,131.45)
  Bottom Layer w1: C81.1@84.262,158.496 85.454,158.496 85.812,158.138 85.812,153.712 ; C70.1@84.262,166.116 85.812,167.666 C_M2.2@85.812,168.656 ; R146.1@86.194,135.636 87.452,135.636 88.048,136.232 ; 88.05,136.232 88.05,152.99 ; 88.05,172.57 C30.2@88.05,189.484 ; P16.3@94,127.99 P16.3@94,128.03 ; C66.1@99.06,135.194 99.06,133.92 99.336,133.644 C4.2@101.136,133.644 ; 110.762,171.538 C29.2@127,171.538 ; C_MIKONA.2@153.42,184.37 153.42,183.45 C71.1@155.006,181.864 ; C52.2@188.302,135.128 188.302,152.752 ; 188.302,171.658 188.302,188 ; C_M4.2@190.52,157.51 190.52,158.45 191.582,159.512 C67.1@192.09,159.512 ; C_M1.2@190.54,168.656 190.54,167.666 191.582,166.624 C68.1@192.09,166.624
  Bottom Layer w1.5: 79.97,137.421 79.97,152.79 80.84,153.66 87.38,153.66 88.05,152.99 ; 80.06,189.681 80.06,173.07 81.28,171.85 87.33,171.85 ; C_M2.2@85.812,168.656 86.586,168.656 87.33,169.4 87.33,171.85 ; 88.05,172.57 87.33,171.85 ; C_DRIBBLER.2@106.172,181.824 106.516,181.824 109.8,178.54 ; 110.762,171.538 109.8,172.5 109.8,178.54 ; 127.721,179.8 111.06,179.8 109.8,178.54 ; 188.302,152.752 189.46,153.91 195.04,153.91 196.54,152.41 196.54,134.649 ; 188.302,171.658 189.02,170.94 ; 190.51,153.96 C_M4.2@190.51,157.5 ; C_M1.2@190.54,168.656 189.414,168.656 189.02,169.05 189.02,170.94 ; 196.48,186.489 196.48,172.07 195.35,170.94 189.02,170.94
  Bottom Layer w2: P16.3@94.04,127.99 P16.3@94.217,127.813
  other v1: 105.462,184.182
  other v4: 188.98,135.94 87.41,138.72 188.98,141.5 87.41,144.22 188.98,147.04 87.41,149.79 115.28,172.18 120.87,172.18 126.47,172.18 188.98,174.02 87.4,177.23 188.98,179.63 87.4,182.9 188.98,185.24 87.4,188.4
VCC: Buzzer.1 C1.1 C2.1 C3.1 C5.1 C6.1 C7.1 C9.1 C63.1 C65.1 C110.1 C120.1 C130.1 C_1.1 C_16.1 C_17.1 C_19.1 D24.1 Dribbler.4 e1.1 e2.1 e3.1 e4.1 MinMax.21 MOTOR_1.4 MOTOR_2.4 MOTOR_3.4 MOTOR_4.4 P1.2 R40.1 R41.1 R42.1 S2D3.20 VR_1.2.3 VR_2.5.1 VR_3.3.3 | length 75.6
  Top Layer w0.3: v1@176.153,121.21 S2D3.20@176.153,122.626
  Top Layer w0.7: C_19.1@111.89,105.814 v1@111.89,107.164 ; C_16.1@112.256,129.58 v1(113.678,129.58) ; D24.1@112.55,99.06 v1@112.55,100.41 ; VR_1.2.3@115.063,111.071 v1@116.413,111.071 ; v1(124.822,129.58) C_17.1@126.244,129.58 ; VR_2.5.1@131.089,111.071 v1@131.089,112.701 ; v1@136.318,125.784 VR_3.3.3@137.668,125.784 ; C63.1@179.324,124.526 v1@180.74,124.526
  Bottom Layer w0.7: v1@105.77,194.398 R40.1@112.518,194.398 ; v1@136.058,121.92 C_1.1@137.408,121.92
  Bottom Layer w1: C120.1@68.072,156.464 e3.1@68.072,160.012 ; e2.1@68.072,166.624 68.072,168.072 69.164,169.164 C9.1@70.736,169.164 ; C130.1@68.178,180.34 MOTOR_2.4@70.104,180.34 ; C110.1@68.228,142.748 MOTOR_3.4@70.104,142.748 ; Dribbler.4@117.633,191.088 C6.1@117.65,193.146 ; v2(132.57,115.39) 147.25,115.39 149.338,117.478 157.486,117.478 C7.1@157.988,117.98 ; P1.2@194.569,114.297 195.277,114.297 C65.1@196.342,113.231 ; C2.1@206.632,156.972 208.512,156.972 209.296,157.756 e4.1@209.296,160.012 ; MOTOR_4.4@207.732,144.208 C1.1@209.724,144.208 ; MOTOR_1.4@207.808,183.264 C5.1@210.312,183.264 ; C3.1@209.296,164.208 e1.1@209.296,166.624
  other v1: 112.554,100.414 111.894,107.168 116.417,111.067 131.093,112.705 176.159,121.204 136.054,121.924 180.746,124.532 136.314,125.788 105.766,194.402
pads on no net: "Gyro & Accel.2" Buzzer.2 Buzzer.3 MinMax.22 S2D3.11 telecontrolli.7 telecontrolli.8 U1.11 U2.18 U3.11 U3.12 U3.13 U3.18 U4.16 U5.142 U6.1 U6.8 U7.1 U7.8 U8.1 U8.8 U9.1 U9.8 U10.1 U10.8 U11.1 U11.8 U12.1 U12.8 U13.1 U13.8 U14.1 U14.8 U15.1 U15.8 U16.1 U16.8 U17.1 U17.8 U18.1 U18.8 U19.1 U19.8 U20.1 U20.8 U22.1 U22.5 U22.8 U27.2 U27.9 U27.12 U27.13 U27.14 U27.15 U27.16 X1.1

## Polygon pours and split planes (outlines as drawn)
no net on InternalPlane1 (split plane): 63.49,162.03 58.518,162.046 58.518,166.992 63.49,166.992
no net on InternalPlane1 (split plane): 219.272,162.028 214.3,162.028 214.3,166.992 219.272,166.992
"V 2.5" on InternalPlane1 (split plane): 157.836,144.06 143.356,144.06 143.161,144.021 142.996,143.91 142.885,143.745 142.846,143.55 142.846,106.48 124.3,106.48 124.105,106.441 123.94,106.33 123.829,106.165 123.79,105.97 123.795,105.945 123.79,105.92 123.79,97.018 119.48,97.018 119.48,105.97 119.48,108.485 140.3,108.485 140.398,108.505 140.48,108.56 140.535,108.642 140.555,108.74 140.555,133.01 140.535,133.108 140.517,133.135 140.48,133.19 138.855,134.816 138.855,154.88 142.77,154.88 142.77,145.89 142.809,145.695 142.92,145.53 143.085,145.419 143.28,145.38 151.206,145.38 151.401,145.419 151.566,145.53 151.677,145.695 151.716,145.89 151.716,166.09 157.836,166.09
"V 12" on InternalPlane1 (split plane): 111.84,187.49 112.005,187.379 112.2,187.34 196.329,187.34 200.6,183.069 200.6,132.521 197.869,129.79 179.67,129.79 179.67,134.109 182.081,136.52 184.9,136.52 185.095,136.559 185.26,136.67 185.371,136.835 185.41,137.03 185.41,171.9 185.371,172.095 185.26,172.26 175.83,181.69 175.665,181.801 175.47,181.84 110.751,181.84 110.65,181.86 110.455,181.821 110.29,181.71 109.569,180.99 90.44,180.99 90.245,180.951 90.08,180.84 89.969,180.675 89.93,180.48 89.93,155.24 89.969,155.045 90.08,154.88 103.17,141.789 103.17,119.76 103.209,119.565 103.32,119.4 103.485,119.289 103.68,119.25 111.88,119.25 111.88,113.181 110.019,111.32 100.036,111.32 74.203,137.153 74.203,186.242 78.081,190.12 109.209,190.12
no net on InternalPlane1 (split plane): 212.789,122.295 210.086,118.83 206.105,121.936 208.871,125.352
no net on InternalPlane1 (split plane): 71.783,121.817 67.798,118.709 64.866,122.468 68.784,125.524
VCC on InternalPlane1 (split plane): 213.272,190.297 213.272,167.51 213.28,167.469 213.28,161.551 213.272,161.51 213.272,132.687 208.386,126.385 208.369,126.352 205.006,122.2 204.974,122.174 194.69,109.511 191.051,113.15 190.885,113.261 190.69,113.3 181.461,113.3 174.98,119.781 174.98,124.379 179.371,128.77 198.08,128.77 198.275,128.809 198.44,128.92 201.47,131.95 201.581,132.115 201.62,132.31 201.62,183.28 201.581,183.475 201.47,183.64 196.9,188.21 196.735,188.321 196.54,188.36 112.411,188.36 109.78,190.99 109.615,191.101 109.42,191.14 77.87,191.14 77.675,191.101 77.51,190.99 73.332,186.813 73.222,186.648 73.183,186.453 73.183,136.942 73.222,136.747 73.332,136.582 99.464,110.45 99.63,110.339 99.662,110.333 99.825,110.3 110.23,110.3 110.425,110.339 110.59,110.45 112.75,112.61 112.861,112.775 112.867,112.807 112.9,112.97 112.9,119.76 112.861,119.955 112.75,120.12 112.585,120.231 112.39,120.27 104.19,120.27 104.19,130.97 133.649,130.97 136.94,127.679 136.94,119.87 134.07,119.87 133.875,119.831 133.71,119.72 133.599,119.555 133.56,119.36 133.56,112.23 118.97,112.23 118.775,112.191 118.61,112.08 118.499,111.915 118.46,111.72 118.46,105.97 118.46,97.018 93.247,97.018 72.913,122.055 72.881,122.081 69.286,126.524 69.269,126.558 64.518,132.677 64.518,161.51 64.51,161.551 64.51,167.469 64.518,167.51 64.518,190.297 69.652,195.472 208.124,195.482
"V 1.2" on InternalPlane1 (split plane): 138.345,134.71 138.365,134.612 138.42,134.53 140.045,132.904 140.045,108.995 119.48,108.995 119.48,111.21 134.07,111.21 134.265,111.249 134.43,111.36 134.541,111.525 134.58,111.72 134.58,118.85 137.45,118.85 137.645,118.889 137.81,119 137.921,119.165 137.96,119.36 137.96,127.89 137.921,128.085 137.81,128.25 134.41,131.651 134.41,154.88 138.345,154.88
"V 3.3" on InternalPlane1 (split plane): 184.39,171.689 184.39,137.54 181.87,137.54 181.675,137.501 181.51,137.39 178.8,134.68 178.689,134.515 178.65,134.32 178.65,129.491 174.11,124.95 173.999,124.785 173.96,124.59 173.96,119.57 173.999,119.375 174.11,119.21 180.89,112.43 181.055,112.319 181.25,112.28 190.479,112.28 194.044,108.715 184.543,97.018 124.81,97.018 124.81,105.46 143.28,105.46 143.475,105.499 143.64,105.61 143.671,105.655 143.717,105.686 143.827,105.851 143.866,106.046 143.866,143.04 158.346,143.04 158.541,143.079 158.707,143.19 158.817,143.355 158.856,143.55 158.856,166.6 158.817,166.795 158.707,166.96 158.541,167.071 158.346,167.11 151.206,167.11 151.011,167.071 150.846,166.96 150.735,166.795 150.696,166.6 150.696,146.4 143.79,146.4 143.79,155.39 143.751,155.585 143.64,155.75 143.475,155.861 143.28,155.9 133.9,155.9 133.705,155.861 133.54,155.75 133.429,155.585 133.39,155.39 133.39,131.99 104.19,131.99 104.19,142 104.151,142.195 104.04,142.36 90.95,155.451 90.95,179.97 109.78,179.97 109.975,180.009 110.14,180.12 110.841,180.82 175.259,180.82
GND on InternalPlane2 (split plane): 63.49,162.03 58.518,162.046 58.518,166.992 63.49,166.992
GND on InternalPlane2 (split plane): 219.272,162.028 214.3,162.028 214.3,166.992 219.272,166.992
GND on InternalPlane2 (split plane): 212.789,122.295 210.086,118.83 206.105,121.936 208.871,125.352
GND on InternalPlane2 (split plane): 71.783,121.817 67.798,118.709 64.866,122.468 68.784,125.524
GND on InternalPlane2 (split plane): 213.272,190.297 213.272,167.51 213.28,167.469 213.28,161.551 213.272,161.51 213.272,132.687 208.386,126.385 208.369,126.352 205.006,122.2 204.974,122.174 184.543,97.018 93.247,97.018 72.913,122.055 72.881,122.081 69.286,126.524 69.269,126.558 64.518,132.677 64.518,161.51 64.51,161.551 64.51,167.469 64.518,167.51 64.518,190.297 69.652,195.472 208.124,195.482

## Keep-outs
Keep-Out Layer:
  lines w0.254: 58,161.51 58,167.51 64,167.51 64,190.51 69.436,195.99 69.44,195.99 69.45,196 208.3,196 213.79,190.51 213.79,167.51 219.79,167.51 219.79,161.51 213.79,161.51 213.79,132.51 208.795,126.068 213.516,122.385 210.176,118.103 205.376,121.847 184.79,96.5 93,96.5 72.51,121.728 67.708,117.982 64.139,122.557 68.86,126.24 64,132.5 64,161.51 58,161.51

## Other copper
InternalPlane1 (plane layer: these items are gaps in the copper):
  lines w0.5: 119.01,108.74 140.3,108.74 140.3,133.01 138.6,134.71 138.6,155.32
  lines w1: 64,161.51 64,167.51 ; 68.86,126.24 72.51,121.728 ; 103.68,131.48 133.86,131.48 137.45,127.89 137.45,119.36 134.07,119.36 134.07,111.72 118.97,111.72 118.97,105.97 118.97,96.56 ; 110.65,181.33 175.47,181.33 184.9,171.9 184.9,137.03 181.87,137.03 179.16,134.32 179.16,129.28 ; 110.65,181.35 109.78,180.48 90.44,180.48 90.44,155.24 103.68,142 103.68,119.76 112.39,119.76 112.39,112.97 110.23,110.81 99.825,110.81 73.693,136.942 73.693,186.453 77.87,190.63 109.42,190.63 112.2,187.85 196.54,187.85 201.11,183.28 201.11,132.31 198.08,129.28 179.16,129.28 ; 124.3,96.51 124.3,105.92 ; 124.3,105.97 143.28,105.97 ; 133.9,131.53 133.9,155.39 143.28,155.39 143.28,145.89 151.206,145.89 151.206,166.6 158.346,166.6 158.346,143.55 143.356,143.55 143.356,106.046 ; 194.735,108.745 190.69,112.79 187.393,112.79 181.25,112.79 174.47,119.57 174.47,124.59 179.16,129.28 ; 205.376,121.847 208.795,126.068 ; 213.79,161.51 213.79,167.51
InternalPlane2 (plane layer: these items are gaps in the copper):
  lines w1: 64,161.51 64,167.51 ; 68.86,126.24 72.51,121.728 ; 205.376,121.847 208.795,126.068 ; 213.79,161.51 213.79,167.51

## Silkscreen, mask and mechanical layers (free items; w line width, h text height)
Top Overlay:
  text "Immortals Robocup" at 94.64,186.36 h1.9 r270
  text "2010  Ali  Salehi" at 97.56,186.26 h2 r270
  text "Soldered By:" at 106.22,123.72 h1.2
  text "Board NO:" at 106.22,119.19 h1.2
Bottom Overlay:
  text "FPGA  by" at 120.65,154.96 h2
  text "MRNiknejad" at 120.86,152 h1.8
  text "LordHippo" at 181.55,98.34 h1.52

## Dimensions
69.45,196 to 184.79,96.5 on Keep-Out Layer
58,167.51 to 219.79,167.51 on Keep-Out Layer

## Text inside footprints (layer, text, board x,y; h text height)
C4: Top Overlay "+" at 100.263,140.68 h1.5 r271
C_DRIBBLER: Top Overlay "+" at 106.922,174.774 h1.5 r90
C_M1: Top Overlay "+" at 197.59,169.406 h1.5 r180
C_M2: Top Overlay "+" at 78.762,167.906 h1.5
C_M3: Top Overlay "+" at 78.762,155.714 h1.5
C_M4: Top Overlay "+" at 197.59,158.23 h1.5 r180
C_MIKONA: Top Overlay "+" at 160.506,185.154 h1.5 r180